# EAGLE board ultrainoplease (EAGLE 8.3.2)
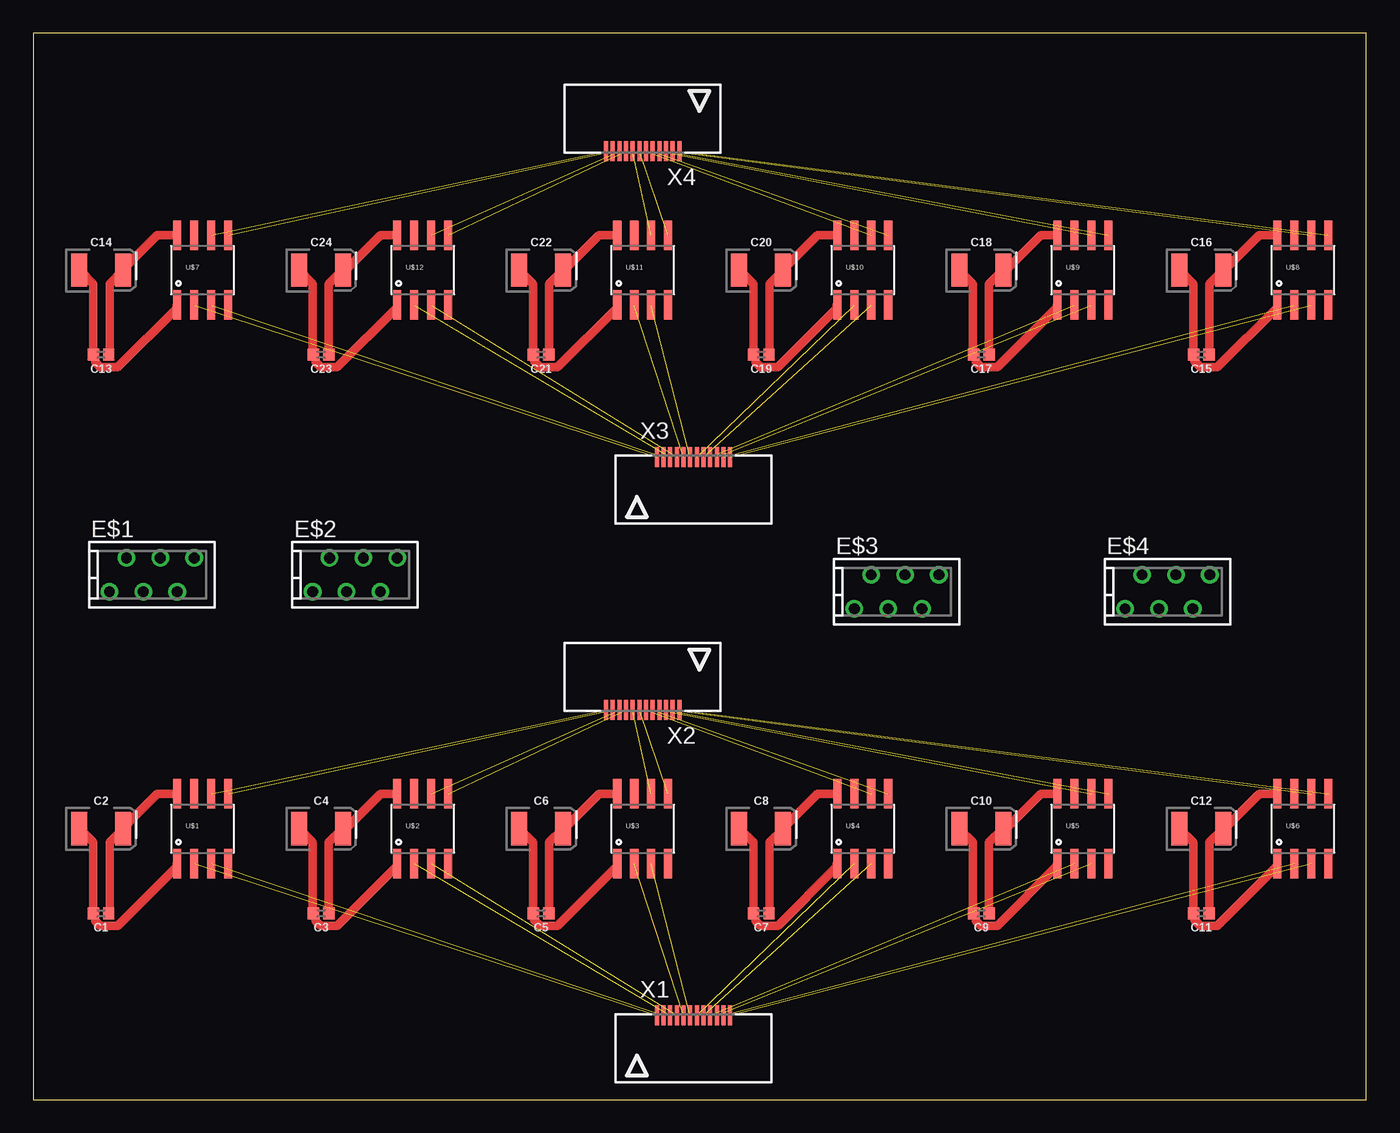
[diagram p0: board, top side]

Size 100 x 80 mm. Coordinates in mm from the lower left corner, seen from the top.
Outline: 0,0 100,0 100,80 0,80 0,0
Copper layers (1*16): Top 0.035mm / dielectric 1.5mm / Bottom 0.035mm
Design rules "default": minimum track width 6mil, minimum drill 0.35mm, track to track 6mil, track to pad 6mil, pad to pad 6mil, via to via 6mil, smd to smd 6mil, copper to edge 40mil, drill to drill 6mil, minimum pad ring 10mil, minimum via ring 8mil, stop-mask expansion 4mil, vias tented up to drill 0mil, thermal gap 10mil
Net classes: 1 GND: width 0.635 mm

## Footprints (pad centres in the part's own frame; a part is rotated, then mirrored left to right if it is on the bottom)
0402 = smd 0.85 x 0.9: 1 -0.58,0; 2 0.58,0
EIA3528 = smd 1.2 x 2.5: A 1.65,0; C -1.65,0
MTOP-6 = drill 0.813: 1 3.175,1.27; 2 1.905,-1.27; 3 0.635,1.27; 4 -0.635,-1.27; 5 -1.905,1.27; 6 -3.175,-1.27
SOIC-8 = smd 0.61 x 2.21: 1 -1.905,-2.616; 2 -0.635,-2.616; 3 0.635,-2.616; 4 1.905,-2.616; 5 1.905,2.616; 6 0.635,2.616; 7 -0.635,2.616; 8 -1.905,2.616
12FLZ-SM = smd 0.3 x 1.5: 1 -2.75,2.5; 2 -2.25,2.5; 3 -1.75,2.5; 4 -1.25,2.5; 5 -0.75,2.5; 6 -0.25,2.5; 7 0.25,2.5; 8 0.75,2.5; 9 1.25,2.5; 10 1.75,2.5; 11 2.25,2.5; 12 2.75,2.5

## Placement (x,y rotation side)
C1  0.1uF  [0402]  5.08,13.97 180 top
C2  47uF  [EIA3528]  5.08,20.32 0 top
C3  0.1uF  [0402]  21.59,13.97 180 top
C4  47uF  [EIA3528]  21.59,20.32 0 top
C5  0.1uF  [0402]  38.1,13.97 180 top
C6  47uF  [EIA3528]  38.1,20.32 0 top
C7  0.1uF  [0402]  54.61,13.97 180 top
C8  47uF  [EIA3528]  54.61,20.32 0 top
C9  0.1uF  [0402]  71.12,13.97 180 top
C10  47uF  [EIA3528]  71.12,20.32 0 top
C11  0.1uF  [0402]  87.63,13.97 180 top
C12  47uF  [EIA3528]  87.63,20.32 0 top
C13  0.1uF  [0402]  5.08,55.88 180 top
C14  47uF  [EIA3528]  5.08,62.23 0 top
C15  0.1uF  [0402]  87.63,55.88 180 top
C16  47uF  [EIA3528]  87.63,62.23 0 top
C17  0.1uF  [0402]  71.12,55.88 180 top
C18  47uF  [EIA3528]  71.12,62.23 0 top
C19  0.1uF  [0402]  54.61,55.88 180 top
C20  47uF  [EIA3528]  54.61,62.23 0 top
C21  0.1uF  [0402]  38.1,55.88 180 top
C22  47uF  [EIA3528]  38.1,62.23 0 top
C23  0.1uF  [0402]  21.59,55.88 180 top
C24  47uF  [EIA3528]  21.59,62.23 0 top
E$1  [MTOP-6]  8.89,39.37 0 top
E$2  [MTOP-6]  24.13,39.37 0 top
E$3  [MTOP-6]  64.77,38.1 0 top
E$4  [MTOP-6]  85.09,38.1 0 top
U$1  TC4427  [SOIC-8]  12.7,20.32 0 top
U$2  TC4427  [SOIC-8]  29.21,20.32 0 top
U$3  TC4427  [SOIC-8]  45.72,20.32 0 top
U$4  TC4427  [SOIC-8]  62.23,20.32 0 top
U$5  TC4427  [SOIC-8]  78.74,20.32 0 top
U$6  TC4427  [SOIC-8]  95.25,20.32 0 top
U$7  TC4427  [SOIC-8]  12.7,62.23 0 top
U$8  TC4427  [SOIC-8]  95.25,62.23 0 top
U$9  TC4427  [SOIC-8]  78.74,62.23 0 top
U$10  TC4427  [SOIC-8]  62.23,62.23 0 top
U$11  TC4427  [SOIC-8]  45.72,62.23 0 top
U$12  TC4427  [SOIC-8]  29.21,62.23 0 top
X1  12FLZ-SM1  [12FLZ-SM]  49.53,3.81 0 top
X2  12FLZ-SM1  [12FLZ-SM]  45.72,31.75 180 top
X3  12FLZ-SM1  [12FLZ-SM]  49.53,45.72 0 top
X4  12FLZ-SM1  [12FLZ-SM]  45.72,73.66 180 top

## Library data of the parts
C1 C3 C5 C7 C9 C11 C13 C15 C17 C19 C21 C23 = capacitor; PROD_ID: CAP-12416
C2 C4 C6 C8 C10 C12 C14 C16 C18 C20 C22 C24 = capacitor; PROD_ID: CAP-08310
E$1-E$4 = con-amp
U$1-U$12 = example
X1-X4 = con-jst; OC_FARNELL: unknown; OC_NEWARK: unknown

## Nets
GND [GND]: C1.1 C2.A U$1.8
GND1 [GND]: C3.1 C4.A U$2.8
GND2 [GND]: C5.1 C6.A U$3.8
GND3 [GND]: C7.1 C8.A U$4.8
GND4 [GND]: C9.1 C10.A U$5.8
GND5 [GND]: C11.1 C12.A U$6.8
GND6 [GND]: C13.1 C14.A U$7.8
GND7 [GND]: C15.1 C16.A U$8.8
GND8 [GND]: C17.1 C18.A U$9.8
GND9 [GND]: C19.1 C20.A U$10.8
GND10 [GND]: C21.1 C22.A U$11.8
GND11 [GND]: C23.1 C24.A U$12.8
N$1 [GND]: U$1.2 X1.1
N$2 [GND]: U$1.3 X1.2
N$3 [GND]: U$1.5 X2.11
N$4 [GND]: U$1.6 X2.12
N$5 [GND]: U$2.2 X1.3
N$6 [GND]: U$2.3 X1.4
N$7 [GND]: U$2.5 X2.9
N$8 [GND]: U$2.6 X2.10
N$9 [GND]: U$3.2 X1.5
N$10 [GND]: U$3.3 X1.6
N$11 [GND]: U$3.5 X2.7
N$12 [GND]: U$3.6 X2.8
N$13 [GND]: U$4.2 X1.7
N$14 [GND]: U$4.3 X1.8
N$15 [GND]: U$4.5 X2.5
N$16 [GND]: U$4.6 X2.6
N$17 [GND]: U$5.2 X1.9
N$18 [GND]: U$5.3 X1.10
N$19 [GND]: U$5.5 X2.3
N$20 [GND]: U$5.6 X2.4
N$21 [GND]: U$6.2 X1.11
N$22 [GND]: U$6.3 X1.12
N$23 [GND]: U$6.5 X2.1
N$24 [GND]: U$6.6 X2.2
N$25 [GND]: U$7.2 X3.1
N$26 [GND]: U$7.3 X3.2
N$27 [GND]: U$7.5 X4.11
N$28 [GND]: U$7.6 X4.12
N$29 [GND]: U$8.2 X3.11
N$30 [GND]: U$8.3 X3.12
N$31 [GND]: U$8.5 X4.1
N$32 [GND]: U$8.6 X4.2
N$33 [GND]: U$9.2 X3.9
N$34 [GND]: U$9.3 X3.10
N$35 [GND]: U$9.5 X4.3
N$36 [GND]: U$9.6 X4.4
N$37 [GND]: U$10.2 X3.7
N$38 [GND]: U$10.3 X3.8
N$39 [GND]: U$10.5 X4.5
N$40 [GND]: U$10.6 X4.6
N$41 [GND]: U$11.2 X3.5
N$42 [GND]: U$11.3 X3.6
N$43 [GND]: U$11.5 X4.7
N$44 [GND]: U$11.6 X4.8
N$45 [GND]: U$12.2 X3.3
N$46 [GND]: U$12.3 X3.4
N$47 [GND]: U$12.5 X4.9
N$48 [GND]: U$12.6 X4.10
VCC [GND]: C1.2 C2.C U$1.1
VCC1 [GND]: C3.2 C4.C U$2.1
VCC2 [GND]: C5.2 C6.C U$3.1
VCC3 [GND]: C7.2 C8.C U$4.1
VCC4 [GND]: C9.2 C10.C U$5.1
VCC5 [GND]: C11.2 C12.C U$6.1
VCC6 [GND]: C13.2 C14.C U$7.1
VCC7 [GND]: C15.2 C16.C U$8.1
VCC8 [GND]: C17.2 C18.C U$9.1
VCC9 [GND]: C19.2 C20.C U$10.1
VCC10 [GND]: C21.2 C22.C U$11.1
VCC11 [GND]: C23.2 C24.C U$12.1

## Tracks (layer width: path | path; a pad name or v marks a point on that pad's centre or on a via)
GND
  Top 0.635: C1.1 5.71,14.02 5.71,19.28 6.71,20.27 C2.A 6.93,20.57 9.3,22.94 U$1.8
GND1
  Top 0.635: C3.1 22.17,14.02 22.17,19.28 23.16,20.27 C4.A 23.55,20.42 26.06,22.94 U$2.8
GND2
  Top 0.635: C5.1 38.71,14.02 38.71,19.28 39.7,20.27 C6.A 40.01,20.5 42.44,22.94 U$3.8
GND3
  Top 0.635: C7.1 55.24,14.02 55.24,19.28 56.24,20.27 C8.A 56.46,20.57 58.83,22.94 U$4.8
GND4
  Top 0.635: C9.1 71.7,14.02 71.7,19.28 72.69,20.27 C10.A 73.08,20.42 75.59,22.94 U$5.8
GND5
  Top 0.635: C11.1 88.24,14.02 88.24,19.28 89.23,20.27 C12.A 89.53,20.5 91.97,22.94 U$6.8
GND6
  Top 0.635: C13.1 5.71,55.93 5.71,61.19 6.71,62.18 C14.A 6.93,62.48 9.3,64.85 U$7.8
GND7
  Top 0.635: C15.1 88.24,55.93 88.24,61.19 89.23,62.18 C16.A 89.53,62.41 91.97,64.85 U$8.8
GND8
  Top 0.635: C17.1 71.7,55.93 71.7,61.19 72.69,62.18 C18.A 73.08,62.33 75.59,64.85 U$9.8
GND9
  Top 0.635: C19.1 55.24,55.93 55.24,61.19 56.24,62.18 C20.A 56.46,62.48 58.83,64.85 U$10.8
GND10
  Top 0.635: C21.1 38.71,55.93 38.71,61.19 39.7,62.18 C22.A 40.01,62.41 42.44,64.85 U$11.8
GND11
  Top 0.635: C23.1 22.17,55.93 22.17,61.19 23.16,62.18 C24.A 23.55,62.33 26.06,64.85 U$12.8
N$1  (1 unrouted)
N$2  (1 unrouted)
N$3  (1 unrouted)
N$4  (1 unrouted)
N$5  (1 unrouted)
N$6  (1 unrouted)
N$7  (1 unrouted)
N$8  (1 unrouted)
N$9  (1 unrouted)
N$10  (1 unrouted)
N$11  (1 unrouted)
N$12  (1 unrouted)
N$13  (1 unrouted)
N$14  (1 unrouted)
N$15  (1 unrouted)
N$16  (1 unrouted)
N$17  (1 unrouted)
N$18  (1 unrouted)
N$19  (1 unrouted)
N$20  (1 unrouted)
N$21  (1 unrouted)
N$22  (1 unrouted)
N$23  (1 unrouted)
N$24  (1 unrouted)
N$25  (1 unrouted)
N$26  (1 unrouted)
N$27  (1 unrouted)
N$28  (1 unrouted)
N$29  (1 unrouted)
N$30  (1 unrouted)
N$31  (1 unrouted)
N$32  (1 unrouted)
N$33  (1 unrouted)
N$34  (1 unrouted)
N$35  (1 unrouted)
N$36  (1 unrouted)
N$37  (1 unrouted)
N$38  (1 unrouted)
N$39  (1 unrouted)
N$40  (1 unrouted)
N$41  (1 unrouted)
N$42  (1 unrouted)
N$43  (1 unrouted)
N$44  (1 unrouted)
N$45  (1 unrouted)
N$46  (1 unrouted)
N$47  (1 unrouted)
N$48  (1 unrouted)
VCC
  Top 0.635: C2.C 3.5,20.27 4.5,19.28 4.5,14.02 C1.2 4.65,13.72 4.65,13.41 5.03,13.03 6.33,13.03 10.74,17.45 10.74,17.68 U$1.1
VCC1
  Top 0.635: C4.C 19.96,20.27 20.95,19.28 20.95,14.02 C3.2 21.18,13.72 21.18,13.41 21.57,13.03 22.78,13.03 27.28,17.53 27.28,17.68 U$2.1
VCC2
  Top 0.635: C6.C 36.5,20.27 37.49,19.28 37.49,14.02 C5.2 37.57,13.64 37.57,13.49 38.02,13.03 39.32,13.03 43.81,17.53 U$3.1
VCC3
  Top 0.635: C8.C 53.03,20.27 54.03,19.28 54.03,14.02 C7.2 54.18,13.72 54.18,13.41 54.56,13.03 55.85,13.03 60.27,17.45 60.27,17.68 U$4.1
VCC4
  Top 0.635: C10.C 69.49,20.27 70.48,19.28 70.48,14.02 C9.2 70.71,13.72 70.71,13.41 71.09,13.03 72.31,13.03 76.81,17.53 76.81,17.68 U$5.1
VCC5
  Top 0.635: C12.C 86.03,20.27 87.02,19.28 87.02,14.02 C11.2 87.1,13.64 87.1,13.49 87.55,13.03 88.85,13.03 93.34,17.53 U$6.1
VCC6
  Top 0.635: C14.C 3.5,62.18 4.5,61.19 4.5,55.93 C13.2 4.65,55.63 4.65,55.32 5.03,54.94 6.33,54.94 10.74,59.36 10.74,59.59 U$7.1
VCC7
  Top 0.635: C16.C 86.03,62.18 87.02,61.19 87.02,55.93 C15.2 87.1,55.55 87.1,55.4 87.55,54.94 88.85,54.94 93.34,59.44 U$8.1
VCC8
  Top 0.635: C18.C 69.49,62.18 70.48,61.19 70.48,55.93 C17.2 70.71,55.63 70.71,55.32 71.09,54.94 72.31,54.94 76.81,59.44 76.81,59.59 U$9.1
VCC9
  Top 0.635: C20.C 53.03,62.18 54.03,61.19 54.03,55.93 C19.2 54.18,55.63 54.18,55.32 54.56,54.94 55.85,54.94 60.27,59.36 60.27,59.59 U$10.1
VCC10
  Top 0.635: C22.C 36.5,62.18 37.49,61.19 37.49,55.93 C21.2 37.57,55.55 37.57,55.4 38.02,54.94 39.32,54.94 43.81,59.44 U$11.1
VCC11
  Top 0.635: C24.C 19.96,62.18 20.95,61.19 20.95,55.93 C23.2 21.18,55.63 21.18,55.32 21.57,54.94 22.78,54.94 27.28,59.44 27.28,59.59 U$12.1